# Altium PCB Routed BOARD 3.pcbdoc (part 3 of 7)
Units mil, origin at the board's own origin, x right, y up, seen from the top; angles counter-clockwise.
Board outline 6225 x 7025 mil, 8 copper layers (TopLayer, MidLayer1, MidLayer2, MidLayer3, MidLayer4, MidLayer5, MidLayer6, BottomLayer); 253 components, 548 nets, 2588 pads, 2014 vias.
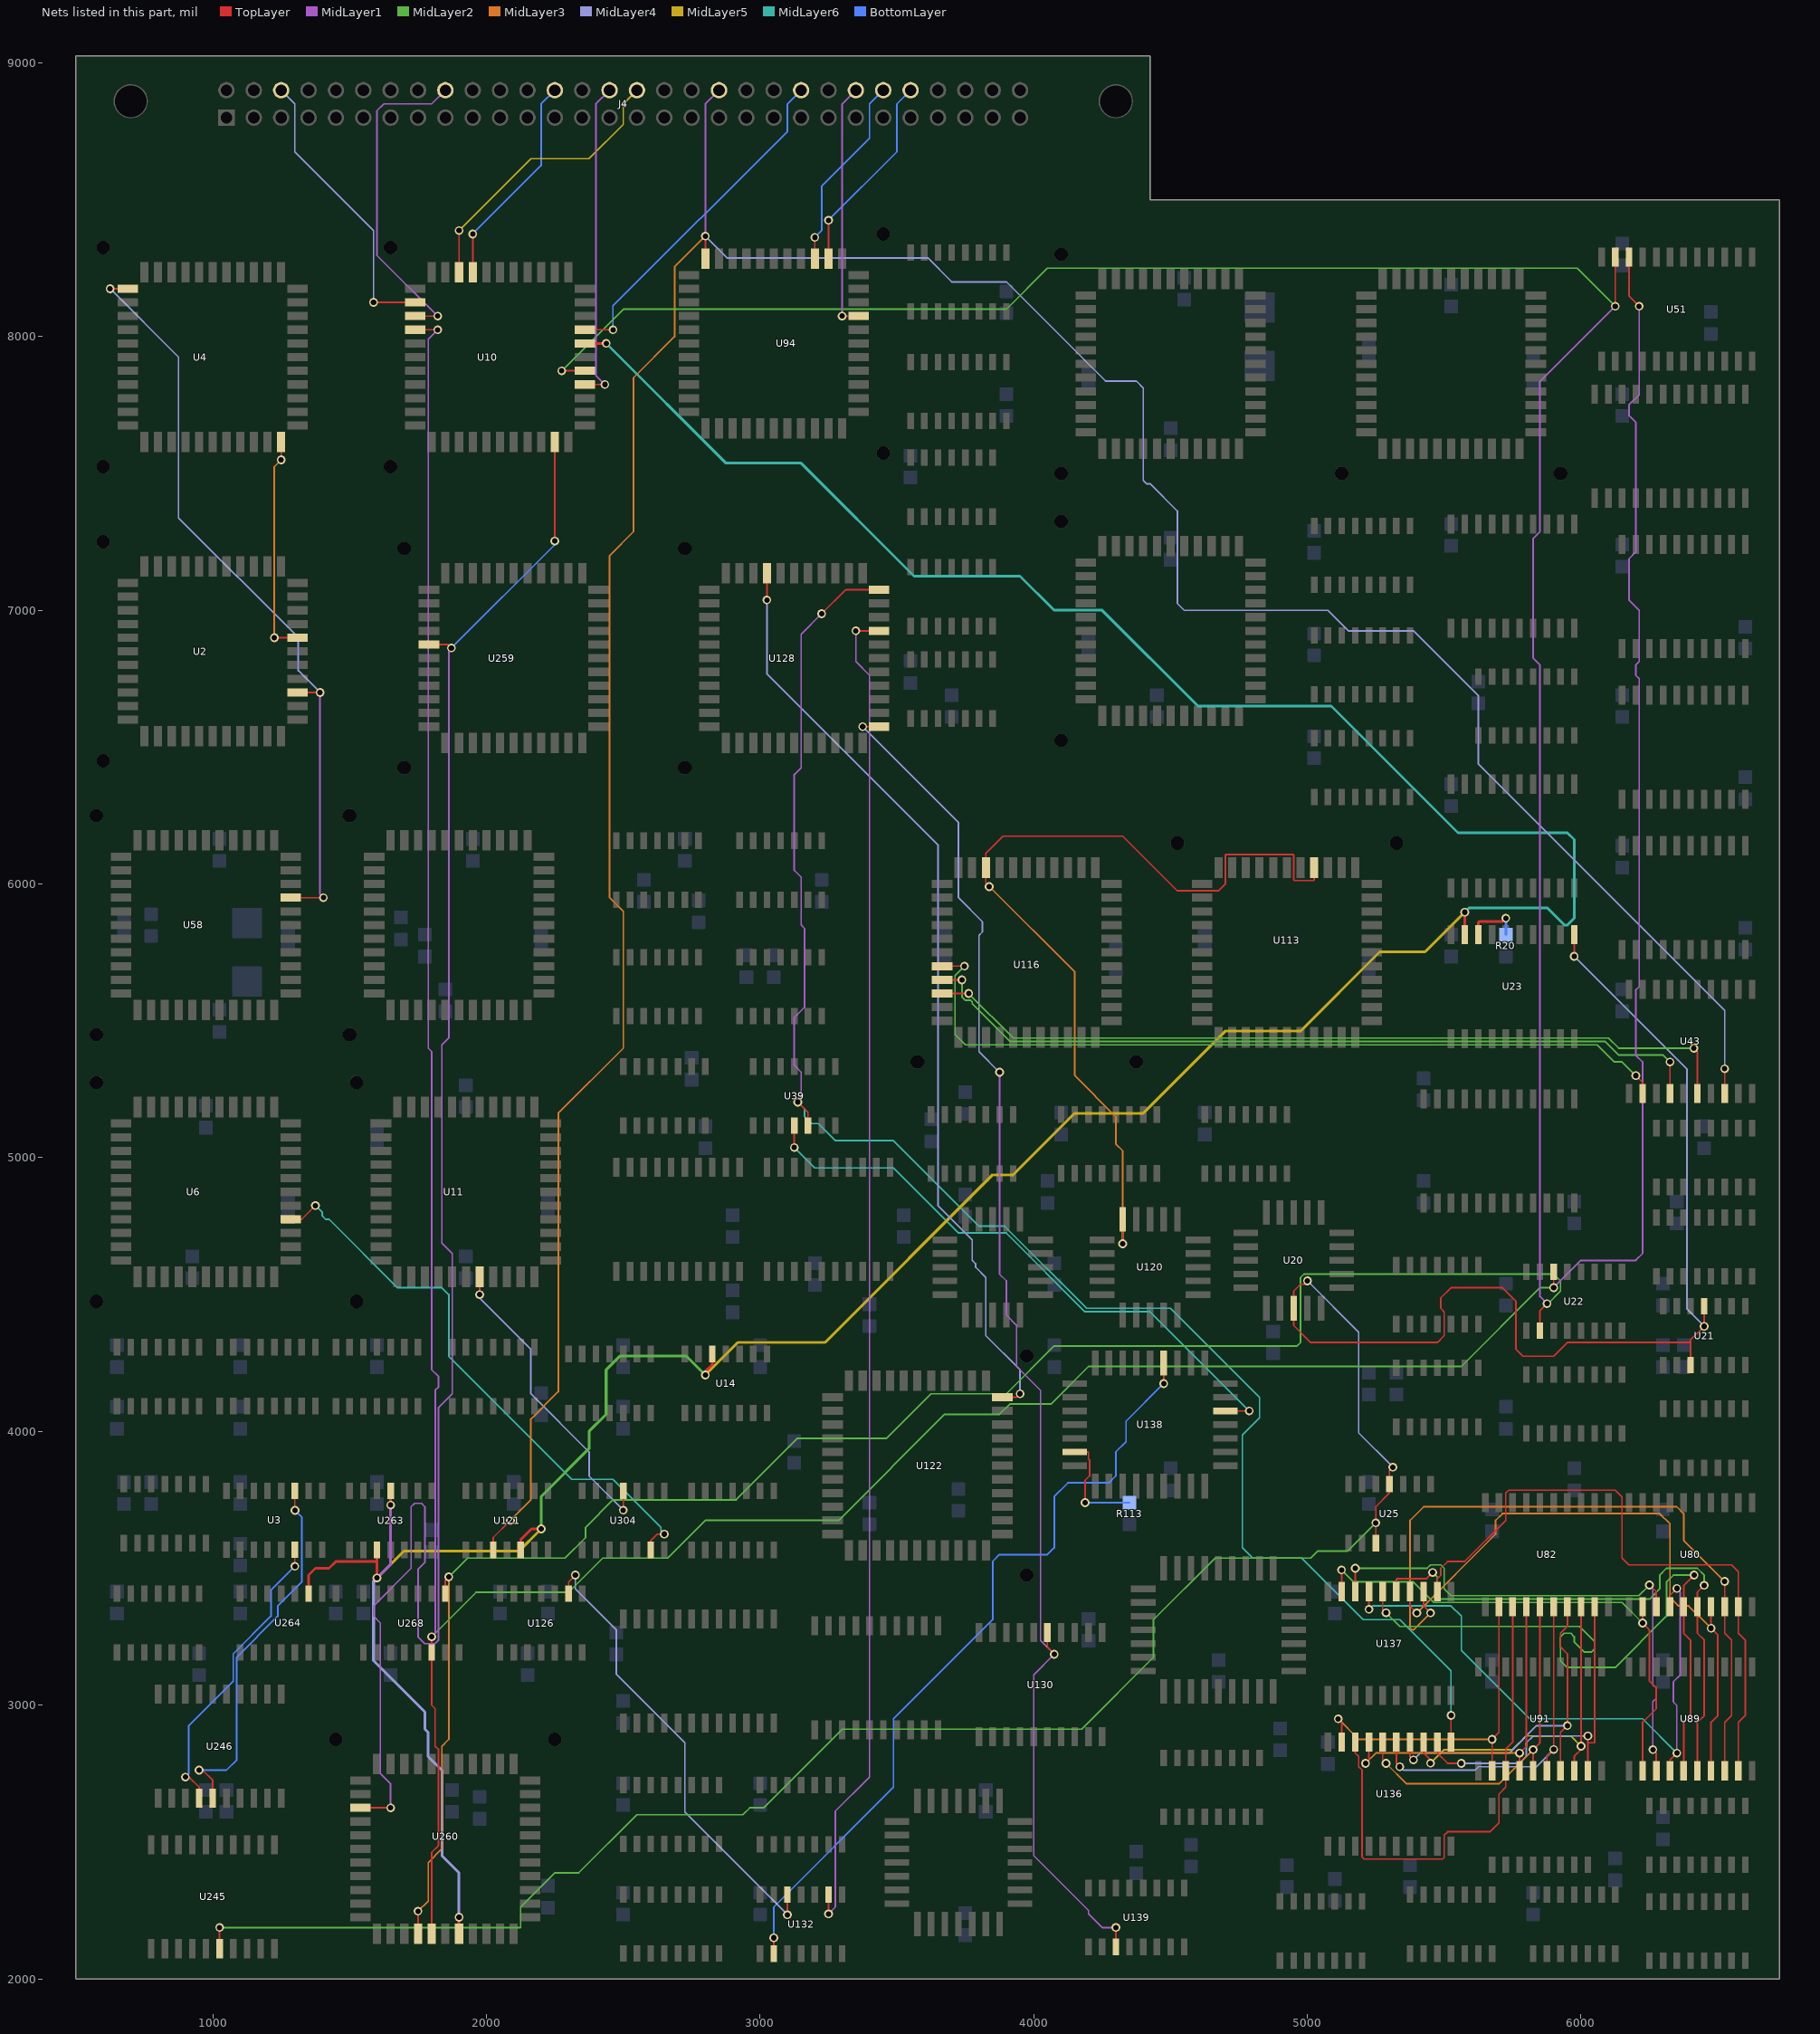
[diagram p9: the nets of this part, all layers, seen from the top]

## Via types
v1: diameter 32, hole 20, TopLayer to BottomLayer, 2014 vias

## Nets (pads, with @x,y where several pads share a name; then routed paths per layer and width w, separated by ;. In a path a pad name is that pad's centre, name@x,y a point inside that pad or via, vN(x,y) a via of type N, cw(c..) or ccw(c..) an arc to the next point about the centre after c; other vN are vias at no path point) (continued)
$18N212: U39.12 U128.17 U136.11 | length 6258
  TopLayer w6: v1(3225,6987.5) 3312.5,7075 U128.17@3435,7075 ; U136.11@5525,2865 v1(5525,2962.5) ; 3175,5166 U39.12@3175,5117 3175,5166 ; 3175,5166 v1(3137.5,5203.5) 3175,5166
  MidLayer1 w6: v1(3137.5,5203.5) 3150,5216 3150,5312.5 3125,5337.5 3125,5512.5 3162.5,5550 3162.5,5837.5 3150,5850 3150,6025 3125,6050 3125,6400 3150,6425 3150,6912.5 v1(3225,6987.5)
  MidLayer6 w6: v1(3137.5,5203.5) 3162.5,5178.5 3162.5,5150 3187.5,5125 3213,5125 3275.5,5062.5 3487.5,5062.5 3800,4750 3893.5,4750 4193.5,4450 4500,4450 4825,4125 4825,4050 4762.5,3987.5 4762.5,3575 4800,3537.5 4979.5,3537.5 5204.5,3312.5 5337.5,3312.5 5525,3125 v1(5525,2962.5)
  other v1: 3137.5,5203.5
$18N213: U39.11 U138.18 | length 2228.2
  TopLayer w6: v1(3125,5037.5) U39.11@3125,5117 ; U138.18@4700,4075 v1(4787.5,4075)
  MidLayer6 w6: v1(3125,5037.5) 3200,4962.5 3487.5,4962.5 3725,4725 3900,4725 4187.5,4437.5 4425,4437.5 v1(4787.5,4075)
$18N220: U128.14 U132.9 | length 4925.8
  TopLayer w6: v1(3250,2237.5) U132.9@3250,2308 ; v1(3350,6925) U128.14@3435,6925
  MidLayer1 w6: v1(3250,2237.5) 3275,2262.5 3275,2612.5 3400,2737.5 3400,6762.5 3350,6812.5 v1(3350,6925)
$18N222: U128.7 U130.5 U139.11 | length 5181.6
  TopLayer w6: v1(3375,6575) U128.7@3435,6575 ; U139.11@4300,2117 v1(4300,2187.5) ; 4050,3212.5 U130.5@4050,3265 4050,3212.5 ; 4050,3212.5 v1@4075,3187.5 ; 4050,3212.5 v1@4075,3187.5 ; v1@4075,3187.5 v1(4075,3186) v1@4075,3187.5
  MidLayer1 w6: v1(3875,5312.5) 3875,4575 3900,4550 3900,4425 3937.5,4387.5 3937.5,4237.5 4025,4150 4025,3236 v1(4075,3186) 4000,3111 4000,2450 4200,2250 4200,2237.5 4250,2187.5 v1(4300,2187.5)
  MidLayer4 w6: v1(3375,6575) 3725,6225 3725,5950 3812.5,5862.5 3812.5,5825 3800,5812.5 3800,5387.5 v1(3875,5312.5)
  other v1: 4075,3186
$18N257: U132.2 U138.24 | length 2938.6
  TopLayer w6: U132.2@3050,2092 v1(3050,2150) ; v1(4475,4175) U138.24@4475,4250
  BottomLayer w6: v1(3050,2150) 3050,2262.5 3487.5,2700 3487.5,2950 3850,3312.5 3850,3525 3875,3550 4050,3550 4075,3575 4075,3762.5 4125,3812.5 4275,3812.5 4300,3837.5 4300,3925 4337.5,3962.5 4337.5,4037.5 v1(4475,4175)
$18N261: R113.2 U138.3 | length 404.5
  TopLayer w6: U138.3@4150,3925 4197.5,3925 4200,3922.5 4200,3900 4204,3896 4204,3837.5 4187.5,3821 v1(4187.5,3740)
  BottomLayer w6: v1(4187.5,3740) R113.2@4350,3740
$18N267: U126.9 U132.12 | length 1713.4
  TopLayer w6: U126.9@2300,3408 2300,3450 v1(2325,3475) ; v1(3100,2234) U132.12@3100,2308
  MidLayer4 w6: v1(2325,3475) 2325,3425 2475,3275 2475,3112.5 2725,2862.5 2725,2609 v1(3100,2234)
$$$230: J4.48 U94.36 | length 905.7
  TopLayer w6: v1(3300,8075) U94.36@3360,8075
  MidLayer1 w6: v1(3300,8075) 3300,8850 J4.48@3350,8900
$$$1197: U11.2 U304.11 | length 1140.5
  TopLayer w6: v1(1975,4500) U11.2@1975,4565 ; v1(2500,3712.5) U304.11@2500,3783
  MidLayer4 w6: v1(1975,4500) 1975,4487.5 2162.5,4300 2162.5,4137.5 2375,3925 2375,3837.5 v1(2500,3712.5)
$$$1829: U6.10 U304.6 | length 2122.6
  TopLayer w6: U6.10@1285,4775 1325,4775 v1(1375,4825) ; U304.6@2600,3567 2600,3600 2625,3625 v1(2650,3625)
  MidLayer6 w6: v1(1375,4825) 1400,4800 1400,4787.5 1412.5,4775 1425,4775 1675,4525 1837.5,4525 1862.5,4500 1862.5,4275 2312.5,3825 2462.5,3825 2637.5,3650 2637.5,3637.5 v1(2650,3625)
$$$2112: J4.50 U94.42 | length 718.6
  TopLayer w6: U94.42@3200,8285 v1(3200,8362.5)
  BottomLayer w6: v1(3200,8362.5) 3225,8387.5 3225,8550 3400,8725 3400,8850 J4.50@3450,8900
$$$2430: U2.13 U4.6 | length 810.4
  TopLayer w6: v1(1225,6900) U2.13@1310,6900 ; v1(1250,7550) U4.6@1250,7615
  MidLayer3 w6: v1(1225,6900) 1225,7525 v1(1250,7550)
$$$2892: J4.6 U10.30 | length 1067.3
  TopLayer w6: v1(1587.5,8125) U10.30@1740,8125
  MidLayer4 w6: J4.6@1250,8900 1300,8850 1300,8675 1587.5,8387.5 v1(1587.5,8125)
$$$3267: J4.32 U10.26 | length 1058.7
  TopLayer w6: U10.26@1900,8235 v1(1900,8387.5)
  MidLayer5 w6: v1(1900,8387.5) 2162.5,8650 2375,8650 2500,8775 2500,8850 J4.32@2550,8900
$$$4473: J4.44 U10.14 | length 1262.3
  TopLayer w6: U10.14@2360,8025 v1(2462.5,8025)
  BottomLayer w6: v1(2462.5,8025) 2462.5,8112.5 3100,8750 3100,8850 J4.44@3150,8900
$$$6297: J4.52 U94.41 | length 739.3
  TopLayer w6: U94.41@3250,8285 v1(3250,8425)
  BottomLayer w6: v1(3250,8425) 3500,8675 3500,8850 J4.52@3550,8900
$$$6956: J4.26 U10.25 | length 789.3
  TopLayer w6: U10.25@1950,8235 v1(1950,8375)
  BottomLayer w6: v1(1950,8375) 2200,8625 2200,8850 J4.26@2250,8900
$$$7829: J4.18 U10.31 | length 1205
  TopLayer w6: U10.31@1740,8075 v1(1822,8075)
  MidLayer1 w6: v1(1822,8075) 1600,8297 1600,8825 1625,8850 1800,8850 J4.18@1850,8900
$$$9241: J4.30 U10.10 | length 1182.4
  TopLayer w6: U10.10@2360,7825 v1(2433,7825)
  MidLayer1 w6: v1(2433,7825) 2400,7858 2400,8850 J4.30@2450,8900
BCAST: U122.39 U128.25 | length 3450.8
  TopLayer w6: v1(3025,7037.5) U128.25@3025,7135 ; U122.39@3885,4125 3937.5,4125 v1(3950,4137.5)
  MidLayer4 w6: v1(3025,7037.5) 3025,6768.5 3650,6143.5 3650,4825 3775,4700 3775,4625 3787.5,4612.5 3787.5,4600 3825,4562.5 3825,4350 3950,4225 v1(3950,4137.5)
BITCLK: U10.13 U14.12 U23.19 U121.5 U260.13 U263.3 U263.11 U264.11 | length 14046
  TopLayer w10: U264.11@1350,3408 1350,3475 1375,3500 1425,3500 1450,3525 1597.5,3525 ; v1(1650,3731) U263.11@1650,3783 ; U260.13@1900,2165 v1(1900,2225) ; U121.5@2125,3567 2125,3604 2165,3644 v1(2200,3644) ; U10.13@2360,7975 v1(2438,7975) ; 1597.5,3525 1600,3527.5 ; 1597.5,3525 1600,3522.5 ; 1597.5,3525 1600,3522.5 ; 1597.5,3525 1600,3527.5 ; 1597.5,3525 1600,3527.5 ; 1597.5,3525 1600,3522.5 ; 1597.5,3525 1600,3527.5 ; 1597.5,3525 1600,3527.5 ; 1597.5,3525 1600,3522.5 ; v1(1600,3465) 1600,3522.5 ; v1(1600,3465) 1600,3522.5 ; v1(1600,3465) 1600,3522.5 ; v1(1600,3465) 1600,3522.5 ; 1600,3527.5 U263.3@1600,3567 ; 1600,3527.5 U263.3@1600,3567 ; 1600,3527.5 U263.3@1600,3567 ; 1600,3527.5 U263.3@1600,3567 ; 1600,3527.5 U263.3@1600,3567 ; v1@2800,4218.5 v1(2800,4206) v1@2800,4218.5 ; v1@2800,4218.5 2825,4243.5 ; v1@2800,4218.5 2825,4243.5 ; 2825,4243.5 U14.12@2825,4283 2825,4243.5 ; U23.19@5575,5815 v1(5575,5897) U23.19@5575,5815
  MidLayer1 w10: v1(1600,3465) 1650,3515 v1(1650,3731)
  MidLayer2 w10: v1(2200,3644) 2200,3762.5 2375,3937.5 2375,4000 2437.5,4062.5 2437.5,4225 2487.5,4275 2731,4275 v1(2800,4206)
  MidLayer4 w10: v1(1600,3465) 1587.5,3452.5 1587.5,3162.5 1775,2975 1775,2912.5 1787.5,2900 1787.5,2812.5 1837.5,2762.5 1837.5,2450 1900,2387.5 v1(1900,2225)
  MidLayer5 w10: v1(2800,4206) 2919,4325 3237.5,4325 3850,4937.5 3925,4937.5 4150,5162.5 4400,5162.5 4700,5462.5 4975,5462.5 5264.5,5752 5430,5752 v1(5575,5897) ; 1697.5,3562.5 v1(1600,3465) 1697.5,3562.5 ; 1697.5,3562.5 2118.5,3562.5 ; 1697.5,3562.5 2118.5,3562.5 ; 2118.5,3562.5 v1(2200,3644) 2118.5,3562.5
  MidLayer6 w10: v1(2438,7975) 2875.5,7537.5 3150,7537.5 3562.5,7125 3950,7125 4075,7000 4250,7000 4600,6650 5087.5,6650 5550,6187.5 5950,6187.5 5975,6162.5 5975,5875 5950,5850 5939.5,5850 5877,5912.5 5590.5,5912.5 v1(5575,5897)
  other v1: 1600,3465 1600,3465 1600,3465 2200,3644 2800,4206 5575,5897
BITCLK1: R20.2 U23.18 | length 211.2
  TopLayer w10: U23.18@5625,5815 5625,5860 5627.5,5862.5 5712.5,5862.5 v1(5725,5875)
  BottomLayer w10: R20.2@5725,5815 v1(5725,5875)
BORT: U2.9 U4.29 U58.14 | length 2896.4
  TopLayer w6: v1(625,8175) U4.29@690,8175 ; U58.14@1285,5950 v1(1404.5,5950) ; U2.9@1310,6700 v1(1392,6700) U2.9@1310,6700
  MidLayer1 w6: v1(1392,6700) 1392,5962.5 v1(1404.5,5950)
  MidLayer4 w6: v1(625,8175) 875,7925 875,7337.5 1312.5,6900 1312.5,6779.5 v1(1392,6700)
  other v1: 1392,6700
BPD0: U82.9 U91.9 U136.12 | length 1428.7
  TopLayer w6: U136.12@5475,2865 5475,2825 5512.5,2787.5 v1(5562.5,2787.5) ; v1(6025,2887.5) U91.9@6025,2760 6025,2862.5 6050,2862.5 U82.9@6050,3360
  MidLayer4 w6: v1(5562.5,2787.5) 5775,2787.5 5800,2812.5 5800,2862.5 5825,2887.5 v1(6025,2887.5)
BPD1: U82.8 U91.8 U136.13 | length 1404.8
  TopLayer w6: U136.13@5425,2865 5425,2825 5450,2800 v1(5450,2788) ; v1(6000,2850) v1@6000,2837.5 ; U82.8@6000,3360 v1@6000,2837.5 ; 5975,2812.5 v1@6000,2837.5 ; 5975,2812.5 U91.8@5975,2760 5975,2812.5 ; 5975,2812.5 v1@6000,2837.5
  MidLayer5 w6: v1(5450,2788) 5499.5,2837.5 5750,2837.5 5800,2887.5 5962.5,2887.5 v1(6000,2850)
BPD2: U82.7 U91.7 U136.14 | length 1771.2
  TopLayer w6: U136.14@5375,2865 5375,2812.5 v1(5387.5,2800) ; U91.7@5925,2760 5925,2900 v1(5950,2925) ; 5925,3212.5 5925,3262.5 ; 5925,3212.5 5950,3187.5 ; 5925,3212.5 5925,3262.5 ; 5925,3212.5 5950,3187.5 ; 5925,3262.5 5950,3287.5 ; 5925,3262.5 5950,3287.5 ; v1(5950,2925) 5950,3187.5 ; v1(5950,2925) 5950,3187.5 ; 5950,3287.5 U82.7@5950,3360 5950,3287.5
  MidLayer4 w6: v1(5387.5,2800) 5412.5,2825 5737.5,2825 5837.5,2925 v1(5950,2925)
BPD3: U82.6 U91.6 U136.15 | length 1826.5
  TopLayer w6: U136.15@5325,2865 5325,2787.5 v1(5337.5,2775) ; U91.6@5875,2760 5875,2813 v1(5900,2838) ; v1(5900,2838) U82.6@5900,3360 v1(5900,2838)
  MidLayer4 w6: v1(5337.5,2775) 5350,2762.5 5612.5,2762.5 5625,2775 5837,2775 v1(5900,2838)
BPD4: U82.5 U91.5 U136.16 | length 1390.9
  TopLayer w6: U136.16@5275,2865 5275,2800 v1(5287.5,2787.5) ; U82.5@5850,3360 5850,2862.5 v1(5825,2837.5) ; v1(5825,2837.5) U91.5@5825,2760 v1(5825,2837.5)
  MidLayer3 w6: v1(5287.5,2787.5) 5362.5,2712.5 5700,2712.5 v1(5825,2837.5)
BPD5: U82.4 U91.4 U136.17 | length 1336.1
  TopLayer w6: v1(5212.5,2787.5) 5225,2800 U136.17@5225,2865 ; U82.4@5800,3360 5800,2850 v1(5775,2825) ; v1(5775,2825) U91.4@5775,2760 v1(5775,2825)
  MidLayer3 w6: v1(5212.5,2787.5) 5250,2825 v1(5775,2825)
BPD6: U82.3 U91.3 U136.18 | length 1846.5
  TopLayer w6: U136.18@5175,2865 5175,2825 5187.5,2812.5 5187.5,2775 5200,2762.5 5200,2445 5207.5,2437.5 5494,2437.5 5500,2443.5 5500,2525 5512.5,2537.5 5667,2537.5 5700,2570.5 5700,2675 5725,2700 U91.3@5725,2760 5725,2839 5750,2864 U82.3@5750,3360
BPD7: U82.2 U91.2 U136.19 | length 1409.1
  TopLayer w6: v1(5112.5,2950) 5125,2937.5 U136.19@5125,2865 ; U82.2@5700,3360 5700,2900 v1(5675,2875) ; v1(5675,2875) U91.2@5675,2760 v1(5675,2875)
  MidLayer3 w6: v1(5112.5,2950) 5187.5,2875 v1(5675,2875)
BPD8: U80.9 U89.9 U137.12 | length 2356.8
  TopLayer w6: U137.12@5475,3415 5475,3462.5 5487.5,3475 5487.5,3500 5512.5,3525 5575,3525 5725,3675 5725,3775 5735.5,3785.5 6125,3785.5 6150,3760.5 6150,3537.5 6175,3512.5 6550,3512.5 6575,3487.5 U80.9@6575,3360 6575,3262.5 6600,3237.5 6600,2962.5 6575,2937.5 U89.9@6575,2760
BPD9: U80.8 U89.8 U137.13 | length 2638.3
  TopLayer w6: U137.13@5425,3415 5425,3362 v1(5450,3337) ; U89.8@6525,2760 6525,2937.5 6550,2962.5 6550,3237.5 6525,3262.5 U80.8@6525,3360 v1(6525,3452)
  MidLayer3 w6: v1(5450,3337) 5388,3275 5383,3275 5375,3283 5375,3675 5425,3725 6350,3725 6375,3700 6375,3602 v1(6525,3452)
BPD10: U80.7 U89.7 U137.14 | length 2374.1
  TopLayer w6: U137.14@5375,3415 5375,3362 v1(5400,3337) ; U89.7@6475,2760 6475,2937.5 6500,2962.5 6500,3256 v1(6475,3281) ; v1(6475,3281) U80.7@6475,3360 v1(6475,3281)
  MidLayer3 w6: v1(5400,3337) 5687.5,3624.5 5687.5,3675 5712.5,3700 6287.5,3700 6325,3662.5 6325,3393.5 6356,3362.5 6393.5,3362.5 v1(6475,3281)
BPD11: U80.6 U89.6 U137.15 | length 2093.1
  TopLayer w6: U137.15@5325,3415 5325,3460 5327.5,3462.5 5436,3462.5 v1(5458,3484.5) ; U89.6@6425,2760 6425,2937.5 6450,2962.5 6450,3237.5 6425,3262.5 U80.6@6425,3360 6425,3413 v1(6450,3438)
  MidLayer2 w6: v1(5458,3484.5) 5475,3467.5 5475,3398.5 5486,3387.5 6250,3387.5 6287.5,3425 6287.5,3475 6312.5,3500 6425,3500 6450,3475 v1(6450,3438)
BPD12: U80.5 U89.5 U137.16 | length 2639
  TopLayer w6: U137.16@5275,3415 5275,3350 v1(5287.5,3337.5) ; U89.5@6375,2760 6375,2937.5 6400,2962.5 6400,3237.5 6375,3262.5 U80.5@6375,3360 6375,3437 v1(6413,3475)
  MidLayer2 w6: v1(5287.5,3337.5) 5337.5,3287.5 5994,3287.5 6050,3231.5 6050,3206.5 6037.5,3194 6012.5,3194 5975,3231.5 5975,3250 5962.5,3262.5 5937.5,3262.5 5925,3250 5925,3162.5 5950,3137.5 6125,3137.5 6312.5,3325 6312.5,3450 6337.5,3475 v1(6413,3475)
BPD13: U80.4 U89.4 U137.17 | length 2340.8
  TopLayer w6: v1(5225,3350) U137.17@5225,3415 ; U80.4@6325,3360 6325,3401.5 v1(6350,3426.5) ; 6325,2800 U89.4@6325,2760 6325,2800 ; 6325,2800 v1(6350,2825) 6325,2800
  MidLayer1 w6: v1(6350,2825) 6350,2999 6337.5,3011.5 6337.5,3085.5 6362.5,3110.5 6362.5,3414 v1(6350,3426.5)
  MidLayer6 w6: v1(5225,3350) 5237.5,3362.5 5525,3362.5 5562.5,3325 5562.5,3200 5812.5,2950 6225,2950 v1(6350,2825)
  other v1: 6350,2825
BPD14: U80.3 U89.3 U137.18 | length 2150.3
  TopLayer w6: U137.18@5175,3415 v1(5175,3500) ; v1(6262.5,2837.5) 6275,2825 U89.3@6275,2760 ; 6275,3414 v1(6250,3439) 6275,3414 ; 6275,3414 U80.3@6275,3360 6275,3414
  MidLayer1 w6: v1(6250,3439) 6262.5,3426.5 6262.5,3075 6275,3062.5 6275,3025 6262.5,3012.5 v1(6262.5,2837.5)
  MidLayer2 w6: v1(5175,3500) 5437.5,3500 5450,3512.5 5487.5,3512.5 5500,3500 5500,3425 5525,3400 6211,3400 v1(6250,3439)
  other v1: 6250,3439
BPD15: U80.2 U89.2 U137.19 | length 1960.8
  TopLayer w6: U137.19@5125,3415 v1(5125,3494) ; U89.2@6225,2760 6225,2937.5 6275,2987.5 6275,3062.5 6250,3087.5 6250,3275 v1(6225,3300) ; v1(6225,3300) U80.2@6225,3360 v1(6225,3300)
  MidLayer2 w6: v1(5125,3494) 5169,3450 5387.5,3450 5462.5,3375 6150,3375 v1(6225,3300)
BRATE0: U10.32 U22.14 U51.22 U260.11 U268.14 | length 14914
  TopLayer w6: U10.32@1740,8025 v1(1822,8025) ; U260.11@1800,2165 1800,2462.5 1825,2487.5 1825,2837.5 1812.5,2850 1812.5,2987.5 1800,3000 U268.14@1800,3192 ; U51.22@6175,8290 6175,8148.5 v1(6212.5,8111) ; U268.14@1800,3192 v1(1800,3250) U268.14@1800,3192 ; v1(5900,4525.5) U22.14@5900,4583 v1(5900,4525.5)
  MidLayer1 w6: v1(1800,3250) 1813,3263 1813,4150.5 1825,4162.5 1825,4200 1800,4225 1800,5387.5 1787.5,5400 1787.5,7990.5 v1(1822,8025) ; v1(5900,4525.5) 5999.5,4625 6200,4625 6225,4650 6225,5350 6200,5375 6200,5612.5 6212.5,5625 6212.5,6750 6200,6762.5 6200,6800 6212.5,6812.5 6212.5,7000 6175,7037.5 6175,7187.5 6200,7212.5 6200,7687.5 6175,7712.5 6175,7750 6212.5,7787.5 v1(6212.5,8111)
  MidLayer2 w6: v1(1800,3250) 1962.5,3412.5 2300,3412.5 2425,3537.5 2662.5,3537.5 2800,3675 3287.5,3675 3675,4062.5 3875,4062.5 3912.5,4100 4062.5,4100 4200,4237.5 5562.5,4237.5 5850.5,4525.5 v1(5900,4525.5)
  other v1: 1800,3250 5900,4525.5
BRATE1: U10.11 U22.2 U51.23 U260.10 U268.2 | length 14795.8
  TopLayer w6: U260.10@1750,2165 v1(1750,2247) ; v1(2275,7875) U10.11@2360,7875 ; 1850,3456 v1(1862.5,3468.5) 1850,3456 ; 1850,3456 U268.2@1850,3407 1850,3456 ; 5850,4441.5 U22.2@5850,4368 5850,4441.5 ; 5850,4441.5 v1(5875.5,4467) 5850,4441.5 ; v1(6125,8111) U51.23@6125,8290 v1(6125,8111)
  MidLayer1 w6: v1(5875.5,4467) 5850,4492.5 5850,6800 5825,6825 5825,7262.5 5850,7287.5 5850,7836 v1(6125,8111)
  MidLayer2 w6: v1(1862.5,3468.5) 1931.5,3537.5 2287.5,3537.5 2362.5,3612.5 2362.5,3650 2462.5,3750 2912.5,3750 3137.5,3975 3462.5,3975 3625,4137.5 3900,4137.5 4075,4312.5 4962.5,4312.5 4975,4325 4975,4562.5 4987.5,4575 5900,4575 5925,4550 5925,4512.5 5879.5,4467 v1(5875.5,4467) ; v1(2275,7875) 2500,8100 3900,8100 4050,8250 5986,8250 v1(6125,8111)
  MidLayer3 w6: v1(1750,2247) 1787.5,2284.5 1787.5,2425 1837.5,2475 1837.5,2850 1862.5,2875 v1(1862.5,3468.5)
  other v1: 1862.5,3468.5 5875.5,4467 6125,8111
BUFLOCK: J4.38 U43.8 U94.6 U121.3 | length 11703.5
  TopLayer w6: U121.3@2025,3567 2025,3612.5 v1(2087.5,3675) ; U43.8@6525,5235 v1(6525,5325) ; U94.6@2800,8285 v1(2800,8367) ; U94.6@2800,8285 v1(2800,8367) ; U94.6@2800,8285 v1(2800,8367)
  MidLayer1 w6: v1(2800,8367) 2800,8850 J4.38@2850,8900
  MidLayer3 w6: v1(2087.5,3675) 2162.5,3750 2162.5,4045.5 2262.5,4145.5 2262.5,5162.5 2500,5400 2500,5900 2450,5950 2450,7200 2537.5,7287.5 2537.5,7850 2687.5,8000 2687.5,8254.5 v1(2800,8367)
  MidLayer4 w6: v1(2800,8367) 2879.5,8287.5 3612.5,8287.5 3700,8200 3900,8200 4262.5,7837.5 4375,7837.5 4400,7812.5 4400,7475 4412.5,7462.5 4425,7462.5 4525,7362.5 4525,7025 4550,7000 5075,7000 5150,6925 5387.5,6925 5625,6687.5 5625,6437.5 6525,5537.5 v1(6525,5325)
  other v1: 2800,8367 2800,8367
BUSERR: U113.32 U116.15 U120.18 | length 3286.7
  TopLayer w6: v1(3837.5,5990.5) 3825,6003 U116.15@3825,6060 3825,6112.5 3887.5,6175 4325,6175 4525,5975 4675,5975 4700,6000 4700,6105 4702.5,6107.5 4949,6107.5 4950,6106.5 4950,6015 4952.5,6012.5 5022.5,6012.5 5025,6015 U113.32@5025,6060 ; v1(4325,4686) U120.18@4325,4775
  MidLayer3 w6: v1(3837.5,5990.5) 4150,5678 4150,5300 4300,5150 4300,5050 4325,5025 v1(4325,4686)
E0: U3.6 U246.14 | length 1101.7
  TopLayer w6: v1(900,2737.5) 912.5,2737.5 950,2700 U246.14@950,2660 ; v1(1300,3507) U3.6@1300,3568
  BottomLayer w6: v1(900,2737.5) 912.5,2750 912.5,2925 1075,3087.5 1075,3187.5 1212.5,3325 1212.5,3419.5 v1(1300,3507)
E180: U3.11 U246.15 | length 1375.3
  TopLayer w6: v1(950,2762.5) 962.5,2762.5 1000,2725 U246.15@1000,2660 ; U3.11@1300,3783 1300,3712.5 v1(1300.5,3712)
  BottomLayer w6: v1(950,2762.5) 1050,2762.5 1087.5,2800 1087.5,3175 1237.5,3325 1237.5,3362.5 1325,3450 1325,3687.5 v1(1300.5,3712)
EOP: U10.5 U259.33 U260.42 | length 6688
  TopLayer w6: U260.42@1540,2625 v1(1650,2625) ; v1(2250,7253) U10.5@2250,7615 ; 1859.5,6875 U259.33@1790,6875 1859.5,6875 ; 1859.5,6875 v1(1872,6862.5) 1859.5,6875
  MidLayer1 w6: v1(1650,2625) 1650,2712.5 1612.5,2750 1612.5,3300 1587.5,3325 1587.5,3362.5 1725,3500 1725,3725 1737.5,3737.5 1762.5,3737.5 1775,3725 1775,3520.5 1750,3495.5 1750,3250 1775,3225 1812.5,3225 1825,3237.5 1825,4087.5 1875,4137.5 1875,4650 1837.5,4687.5 1837.5,5412.5 1862.5,5437.5 1862.5,6853 v1(1872,6862.5)
  BottomLayer w6: v1(1872,6862.5) 2250,7240.5 v1(2250,7253)
  other v1: 1872,6862.5
ERR0: U43.2 U116.24 | length 2971.3
  TopLayer w6: U116.24@3665,5700 v1(3747,5700) ; v1(6200,5300) 6225,5275 U43.2@6225,5235
  MidLayer2 w6: v1(3747,5700) 3712.5,5665.5 3712.5,5450 3750,5412.5 6059.5,5412.5 6122,5350 6150,5350 v1(6200,5300)
ERR1: U43.4 U116.25 | length 2940
  TopLayer w6: U116.25@3665,5650 v1(3737.5,5650) ; U43.4@6325,5235 v1(6325,5350)
  MidLayer2 w6: v1(3737.5,5650) 3737.5,5587.5 3750,5575 3769.5,5575 3775,5569.5 3775,5562.5 3912.5,5425 6087.5,5425 6137.5,5375 6300,5375 v1(6325,5350)
ERR2: U43.6 U116.26 | length 3000.5
  TopLayer w6: U116.26@3665,5600 v1(3762.5,5600) ; v1(6412.5,5400) 6425,5387.5 U43.6@6425,5235
  MidLayer2 w6: v1(3762.5,5600) 3925,5437.5 6100,5437.5 6137.5,5400 v1(6412.5,5400)
FCHIPDIV4M: U20.1 U21.3 U21.11 U23.11 U25.3 U25.11 U245.16 | length 10399
  TopLayer w6: U245.16@1025,2110 v1(1025,2187.5) ; v1(5000,4550) 5000,4540 4997.5,4537.5 4975,4537.5 4950,4512.5 U20.1@4950,4450 4950,4387.5 5012.5,4325 5475,4325 5500,4350 5500,4437.5 5487.5,4450 5487.5,4487.5 5525,4525 5712.5,4525 5762.5,4475 5762.5,4300 5787.5,4275 5900,4275 5950,4325 6400,4325 6400,4334 ; v1(5250,3666) U25.3@5250,3592 5250,3725 5300,3775 U25.11@5300,3808 5300,3857 v1(5312.5,3869.5) ; v1(5975,5736) U23.11@5975,5815 ; U21.3@6400,4242 6400,4334 ; 6400,4334 v1(6450,4384) ; 6400,4334 v1(6450,4384) ; v1(6450,4384) U21.11@6450,4458 ; v1(6450,4384) U21.11@6450,4458 ; v1(6450,4384) U21.11@6450,4458
  MidLayer2 w6: v1(1025,2187.5) 2125,2187.5 2125,2262.5 2250,2387.5 2337.5,2387.5 2550,2600 2937.5,2600 2962.5,2625 3012.5,2625 3300,2912.5 4175,2912.5 4437.5,3175 4437.5,3312.5 4662.5,3537.5 5012.5,3537.5 5037.5,3562.5 5146.5,3562.5 v1(5250,3666)
  MidLayer4 w6: v1(5000,4550) 5187.5,4362.5 5187.5,3994.5 v1(5312.5,3869.5) ; v1(5975,5736) 6387.5,5323.5 6387.5,4446.5 v1(6450,4384)